# EAGLE board nRF2401A-Trace (EAGLE 6.4)
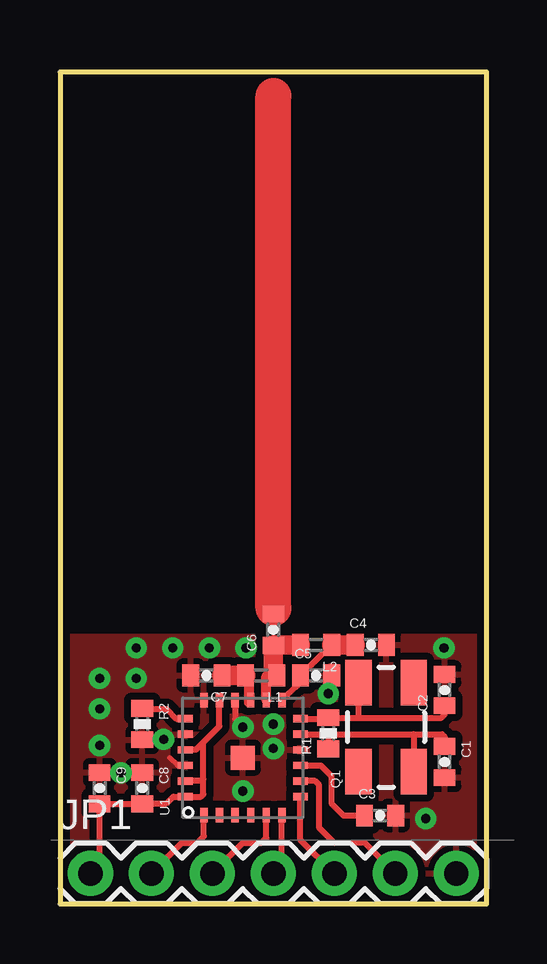
[diagram p0: board, top side]
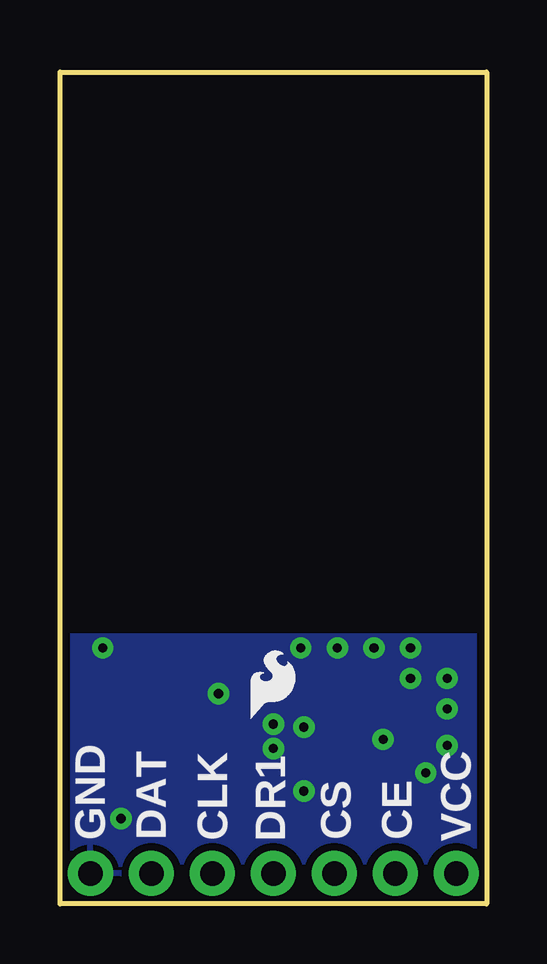
[diagram p1: board, bottom side, seen from below]

Size 17.78 x 34.67 mm. Coordinates in mm from the lower left corner, seen from the top.
Outline: 0,0 17.78,0 17.78,34.67 0,34.67 0,0
Copper layers (1*16): Top 0.035mm / dielectric 1.5mm / Bottom 0.035mm
Design rules "SparkFun *": minimum track width 8mil, minimum drill 15mil, track to track 8mil, track to pad 8mil, pad to pad 8mil, via to via 8mil, smd to smd 8mil, copper to edge 10mil, drill to drill 8mil, minimum pad ring 12mil, minimum via ring 10mil, stop-mask expansion 4mil, vias tented up to drill 20mil, thermal gap 10mil

## Footprints (pad centres in the part's own frame; a part is rotated, then mirrored left to right if it is on the bottom)
0402-CAP = smd 0.7 x 0.9: 1 -0.65,0; 2 0.65,0
1X07 = drill 1.016 pad 1.88: 1 0,0; 2 2.54,0; 3 5.08,0; 4 7.62,0; 5 10.16,0; 6 12.7,0; 7 15.24,0
C0402 = smd 0.7 x 0.9: 1 -0.65,0; 2 0.65,0
CRYSTAL-SMD-5X3 = smd 1.9 x 1.1: 1 -1.85,-1.15; 2 1.85,-1.15; 3 1.85,1.15; 4 -1.85,1.15
0402-RES = smd 0.7 x 0.9: 1 -0.65,0; 2 0.65,0
MLP-24 = smd 1 x 1: 0 0,0 | smd 0.61 x 0.305: 1 -2.401,1.625; 2 -2.401,0.975; 3 -2.401,0.325; 4 -2.401,-0.325; 5 -2.401,-0.975; 6 -2.401,-1.625; 13 2.401,-1.625; 14 2.401,-0.975; 15 2.401,-0.325; 16 2.401,0.325; 17 2.401,0.975; 18 2.401,1.625 | smd 0.305 x 0.61: 7 -1.625,-2.401; 8 -0.975,-2.401; 9 -0.325,-2.401; 10 0.325,-2.401; 11 0.975,-2.401; 12 1.625,-2.401; 19 1.625,2.401; 20 0.975,2.401; 21 0.325,2.401; 22 -0.325,2.401; 23 -0.975,2.401; 24 -1.625,2.401

## Placement (x,y rotation side)
C1  22pF  [0402-CAP]  16.02,5.92 270 top
C2  22pF  [0402-CAP]  16.02,8.92 90 top
C3  33nF  [0402-CAP]  13.34,3.68 0 top
C4  2.2nF  [0402-CAP]  12.95,10.79 0 top
C5  22pF  [0402-CAP]  10.67,9.53 0 top
C6  1.0pF  [0402-CAP]  8.89,11.43 90 top
C7  1.0pF  [0402-CAP]  6.1,9.53 180 top
C8  10nF  [0402-CAP]  3.43,4.83 270 top
C9  1nF  [0402-CAP]  1.65,4.83 270 top
JP1  [1X07]  1.27,1.27 0 top
L1  3.3nH  [C0402]  8.38,9.53 180 top
L2  33nH  [C0402]  10.67,10.79 180 top
Q1  16MHz  [CRYSTAL-SMD-5X3]  13.59,7.37 90 top
R1  1M  [0402-RES]  11.18,7.11 90 top
R2  22K  [0402-RES]  3.43,7.49 270 top
U1  NRF2401ASMD  [MLP-24]  7.62,6.1 90 top
U$1  LOGO-SFESK  [SFE-LOGO-FLAME]  9.84,7.73 0 bottom

## Library data of the parts
C1-C9 JP1 L1 L2 Q1 R1 R2 U1 U$1 = SparkFun

## Nets
ANT: C6.2
CE: JP1.2 U1.1
CLK1: JP1.5 U1.7
CS: JP1.3 U1.5
DATA: JP1.6 U1.8
DR1: JP1.4 U1.6
GND: C1.2 C2.2 C3.2 C4.2 C5.2 C7.2 C8.1 C9.1 JP1.7 R2.2 U1.0 U1.10 U1.16 U1.18 U1.20 U1.22
N$1: C1.1 Q1.1 R1.1 U1.11
N$2: C2.1 Q1.3 R1.2 U1.12
N$3: C6.1 L1.1 L2.2 U1.14
N$4: R2.1 U1.19
N$5: C3.1 U1.9
N$6: C7.1 L1.2 U1.15
N$7: C4.1 C5.1 L2.1 U1.13
VCC: C8.2 C9.2 JP1.1 U1.17 U1.21 U1.23 U1.24

## Tracks (layer width: path | path; a pad name or v marks a point on that pad's centre or on a via)
CE
  Top 0.254: U1.1 6,2.82 5.71,2.54 5.08,2.54 JP1.2
CLK1
  Top 0.254: U1.7 10.02,2.68 JP1.5
CS
  Top 0.254: U1.5 8.6,2.75 8.38,2.54 7.62,2.54 JP1.3
DATA
  Top 0.254: U1.8 10.63,5.12 10.79,4.95 10.79,3.17 11.43,2.54 12.7,2.54 JP1.6
DR1
  Top 0.254: U1.6 9.24,1.62 JP1.4
GND  (via drill 0.38)
  Top 0.203: C1.2 15.86,5.1 | 3.72,6.96 R2.2 3.7,7.11 | U1.22 4.9,5.77 4.57,6.1 | C9.1 2.52,5.48 v2.54,5.46 3.43,5.46 C8.1
  Top 0.254: U1.16 7.29,7.69 v7.62,7.37
  other vias: 16,10.67 15.24,3.56 6.22,10.67 3.17,10.67 7.62,4.7 8.89,6.48 8.89,7.49 1.65,9.4 1.65,8.13 1.65,6.6 4.7,10.67 4.32,6.86 11.18,8.76 7.75,10.67 3.17,9.4
  pour Top (isolate 0.305): 0,0 0,11.18 17.78,11.18 17.78,0
  pour Bottom (isolate 0.305): 0,0 0,11.18 17.78,11.18 17.78,0
N$1
  Top 0.254: C1.1 16.02,6.96 15.92,7.07 14.73,7.07 | U1.11 11.18,7.07 | 11.18,7.07 14.73,7.07 | 11.18,7.07 R1.1 | 14.73,7.07 14.73,6.99 14.74,6.98 Q1.1
N$2
  Top 0.254: U1.12 11.15,7.72 11.18,7.75 R1.2 12.45,7.76 | C2.1 16.02,7.89 15.89,7.76 12.45,7.76 | 12.45,7.76 12.45,7.87 12.44,7.88 Q1.3
N$3
  Top 0.203: L1.1 8.89,9.65 | L2.2 9.91,10.79 | C6.1 8.9,10.79
  Top 0.406: L1.1 8.64,9.53 8.6,9.48 U1.14
  Top 0.813: 8.89,9.65 C6.1 | 8.9,10.79 L2.2
N$4
  Top 0.254: U1.19 4.85,7.72 4.45,8.13 3.43,8.13 R2.1
N$5
  Top 0.254: U1.9 10.87,5.77 11.3,5.33 11.3,4.19 11.81,3.68 C3.1
N$6
  Top 0.203: 7.87,8.38 7.88,8.38 U1.15 | L1.2 7.87,9.38
  Top 0.406: 7.87,9.38 7.87,8.38
  Top 0.813: C7.1 6.86,9.53 L1.2
N$7
  Top 0.203: 12.45,10.79 12.19,10.92 C4.1 | 9.91,9.11 9.91,9.65 C5.1 10.03,9.53 | 11.3,10.79 L2.1
  Top 0.254: U1.13 9.91,9.11 | 10.03,9.53 11.3,10.79
  Top 0.813: L2.1 C4.1
N$8
  Top 1.5: 8.89,12.32 8.89,33.68
VCC
  Top 0.254: JP1.1 1.65,1.65 C9.2 1.67,4.18 C8.2 4.45,4.19 4.72,4.47 U1.24 5.87,4.47 5.97,4.57 5.97,5.21 | U1.21 5.66,6.42 5.97,6.73 | U1.17 6.64,7.41 5.97,6.73 | 5.97,5.21 5.97,6.73 | U1.23 5.88,5.12 5.97,5.21

## Text on the board
bPlace: VCC | CE | CS | DR1 | CLK | DAT | GND
tValues: nRF2401A w/ Trace Antenna